# EAGLE board naiLED_eagle_119-2sa (EAGLE 8.2.2)
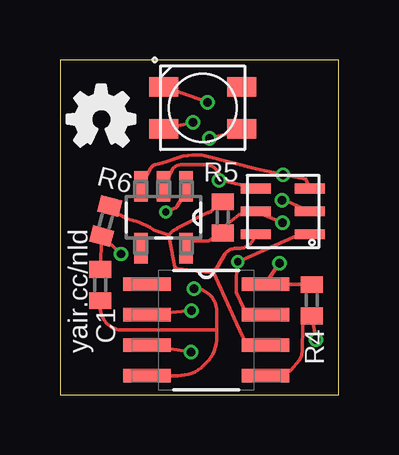
[diagram p0: board, top side]
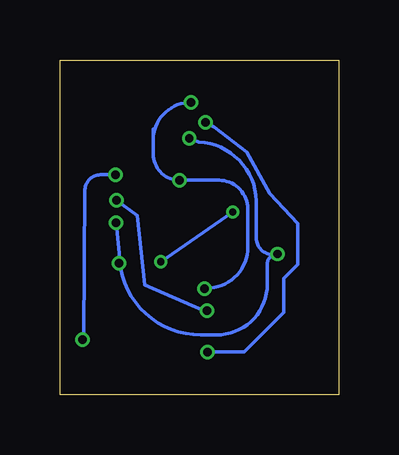
[diagram p1: board, bottom side, seen from below]

Size 11.61 x 13.96 mm. Coordinates in mm from the lower left corner, seen from the top.
Outline: 0,0 11.61,0 11.61,13.96 0,13.96 0,0
Copper layers (1*16): TOP 0.018mm / dielectric 1.55mm / BOTTOM 0.018mm
Design rules "eC_2Layer_PClass6_BaseCopperO18_eCDefault": minimum track width 0.15mm, minimum drill 0.35mm, track to track 0.15mm, track to pad 0.15mm, pad to pad 0.15mm, via to via 0.15mm, smd to smd 0mil, copper to edge 0.25mm, drill to drill 0.35mm, minimum pad ring 0.175mm, minimum via ring 0.125mm, stop-mask expansion 0mil, vias tented up to drill 0.45mm, thermal gap 0.2mm
Net classes: 0 default: width 0.152 mm, clearance 0.152 mm

## Footprints (pad centres in the part's own frame; a part is rotated, then mirrored left to right if it is on the bottom)
C402 = smd 0.7 x 0.9: 1 -0.65,0; 2 0.65,0
DFN-6PIN = smd 1.25 x 0.4: P$1 -1.1,0.95; P$2 -1.1,0; P$3 -1.1,-0.95; P$4 1.15,0.95; P$5 1.15,0; P$6 1.15,-0.95
R402 = smd 0.7 x 0.9: 1 -0.65,0; 2 0.65,0
SOT95P290X145-5N = smd 1.27 x 0.559: 1 -1.295,0.94; 2 -1.295,0; 3 -1.295,-0.94; 4 1.295,-0.94; 5 1.295,0.94
SOIC127P600X175-8N = smd 1.981 x 0.559: 1 -2.464,1.905; 2 -2.464,0.635; 3 -2.464,-0.635; 4 -2.464,-1.905; 5 2.464,-1.905; 6 2.464,-0.635; 7 2.464,0.635; 8 2.464,1.905
LED-3535 = smd 1.2 x 0.8: 1 -1.625,0.875; 2 -1.625,-0.875; 3 1.625,-0.875; 4 1.625,0.875

## Placement (x,y rotation side)
C1  [C402]  1.68,4.57 270 top
E$1  [OSHW_FILLX100_NOTEXT]  0.3,10.36 0 top
IC1  TCS3414  [DFN-6PIN]  9.3,7.65 180 top
R4  [R402]  10.49,3.94 90 top
R5  [R402]  6.78,7.39 270 top
R6  [R402]  1.91,7.24 75 top
U2  [SOT95P290X145-5N]  4.32,7.39 270 top
U3  [SOIC127P600X175-8N]  6.1,2.69 0 top
U$1  SK6812MINI  [LED-3535]  5.94,11.96 0 top

## Library data of the parts
C1 E$1 IC1 R4-R6 U$1 = naiLED_eagle_119-2sa
U2 = naiLED_eagle_119-2sa; MPN: 24LC00T-I/OT; OC_FARNELL: 9757864; OC_NEWARK: 62K0574; PACKAGE: SOT-23-5; SUPPLIER: MICROCHIP
U3 = naiLED_eagle_119-2sa; MPN: ATTINY25-20SSU; OC_FARNELL: 1636951; OC_NEWARK: 03P2036; PACKAGE: SOIC-8; SUPPLIER: Atmel

## Nets
D0/PWM/MOSI/SDA: IC1.P$3 R4.1 U2.3 U3.5
D1/PWM/MISO: IC1.P$4 R5.1 R6.2 U3.6
D2/A1/SCK/SCL: IC1.P$1 U2.1 U3.7
D3/A3: IC1.P$2 U3.2
D4/PWM: U3.3 U$1.2
GND: C1.2 IC1.P$6 U2.2 U3.4 U$1.1
VCC: C1.1 IC1.P$5 R4.2 R5.2 R6.1 U2.5 U3.8 U$1.3

## Tracks (layer width: path | path; a pad name or v marks a point on that pad's centre or on a via)
D0/PWM/MOSI/SDA  (via drill 0.35)
  TOP 0.152: U3.5 9.47,0.99 9.55,0.99 arc50 9.61,1.02 9.96,1.43 arc39 10.09,1.76 10.12,2.94 10.12,3.01 R4.1 v10.67,2.29 | IC1.P$3 10.24,8.98 v9.3,9.17 arc-4 6.1,9.96 arc32 4.75,9.83 arc-10 3.99,9.6 arc50 3.79,9.45 U2.3
  BOTTOM 0.152: v9.3,9.17 9.88,9.17 arc-90 10.57,8.56 10.62,2.41 v10.67,2.29
D1/PWM/MISO
  TOP 0.152: R5.1 6.43,7.84 6.36,7.72 arc-63 6.16,7.6 4.89,6.94 arc-1 4.88,6.94 4.75,6.86 arc14 4.7,6.83 4.53,6.66 | U3.6 7.64,2.26 7.64,2.34 arc25 7.64,2.37 7.36,2.95 6.41,5.08 | R6.2 2.3,7.59 arc-26 2.34,7.58 2.83,7.33 arc8 3.28,7.21 3.76,6.97 3.91,6.87 4.53,6.66 | 7.6,6.57 IC1.P$4 arc-85 7.37,6.1 arc59 6.86,5.84 6.41,5.08 | 4.53,6.66 4.75,5.42 arc74 4.96,5.23 6.41,5.08
D2/A1/SCK/SCL  (via drill 0.3, 0.3 pad 0.5)
  TOP 0.152: U2.1 5.05,8.13 4.88,7.87 arc-55 4.84,7.81 v4.41,7.62 | U3.7 7.64,3.53 7.64,3.61 arc25 7.64,3.64 7.36,4.22 arc-25 7.34,4.32 7.34,4.88 arc-6 7.34,4.9 v7.41,5.54 9.74,6.57 arc-24 9.77,6.57 9.85,6.57 IC1.P$1
  BOTTOM 0.152: v4.41,7.62 v7.41,5.54
D3/A3  (via drill 0.35)
  TOP 0.152: IC1.P$2 9.45,8.08 v9.25,8.1 | v5.49,3.5 U3.2
  BOTTOM 0.152: v9.25,8.1 8.38,7.47 8.08,4.57 5.64,3.5 v5.49,3.5
D4/PWM  (via drill 0.35)
  TOP 0.152: U3.3 5.44,1.78 arc18 v5.46,1.78 | v5.54,11.35 U$1.2
  BOTTOM 0.152: v5.46,1.78 3.94,1.78 2.29,3.43 2.29,4.85 1.7,5.44 1.7,7.14 2.87,8.38 3.83,10.11 5.18,11.15 v5.54,11.35
GND  (via drill 0.35)
  TOP 0.152: IC1.P$6 6.63,8.97 arc207 v6.63,8.94 arc-90 6.64,8.95 6.68,8.95 arc90 6.03,9.6 5.04,9.6 4.86,9.55 4.8,9.52 4.72,9.45 U2.2 | U$1.1 v6.15,12.19 | 5.84,4.42 v5.59,4.42 arc-90 6.53,3.48 6.53,2.72 | U3.4 4.9,0.79 arc90 6.53,2.41 6.53,2.72 | C1.2 1.68,3.63 arc90 2.62,2.69 6.5,2.69 arc90 6.53,2.72
  BOTTOM 0.152: v5.59,4.42 arc90 5.56,4.45 5.49,4.45 arc-90 3.79,6.15 3.79,7.75 arc-90 4.98,8.94 v6.63,8.94 arc90 7.72,10.03 7.72,10.41 | 7.72,11.07 7.72,10.41 | 7.72,10.41 7.72,10.62 arc90 v6.15,12.19
VCC  (via drill 0.35)
  TOP 0.152: U2.5 5.46,6.42 6.18,6.42 R5.2 6.93,6.96 6.93,7.04 arc-52 6.96,7.1 7.47,7.5 arc-38 7.52,7.52 7.6,7.52 IC1.P$5 v9.27,7.16 | R4.2 10.12,4.59 9.47,4.59 U3.8 v9.14,5.49 | C1.1 R6.1 2.52,5.92 arc-52 v2.54,5.87 | v6.22,10.69 7.78,11.05 arc90 U$1.3
  BOTTOM 0.152: v9.27,7.16 9.14,5.89 | 9.14,5.89 v9.14,5.49 | v6.22,10.69 5.82,10.54 arc90 3.43,7.85 3.43,6.53 arc-107 v2.54,5.87 arc-90 2.97,5.44 2.97,4.6 arc90 5.08,2.49 5.74,2.49 arc90 9.14,5.89

## Text on the board
tPlace: yair.cc/nld